# Altium PCB imu-pcb.PcbDoc
Units mil, origin at the board's own origin, x right, y up, seen from the top; angles counter-clockwise.
Board outline 905.51 x 1181.1 mil, 2 copper layers (Top Layer, Bottom Layer); 7 components, 11 nets, 28 pads, 1 vias.
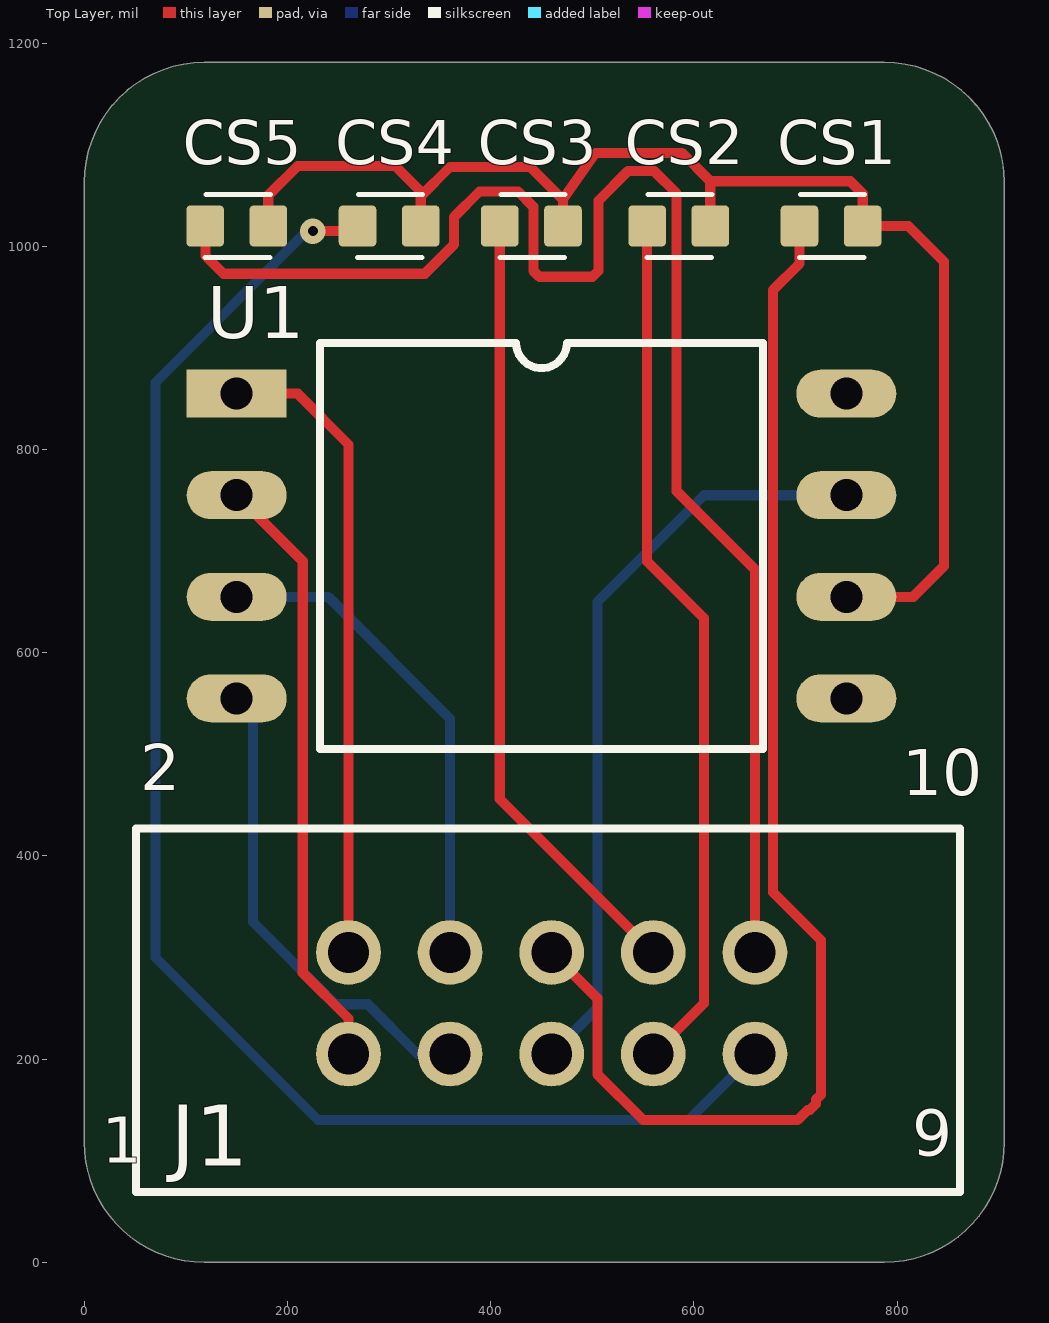
[diagram p0: Top Layer view]
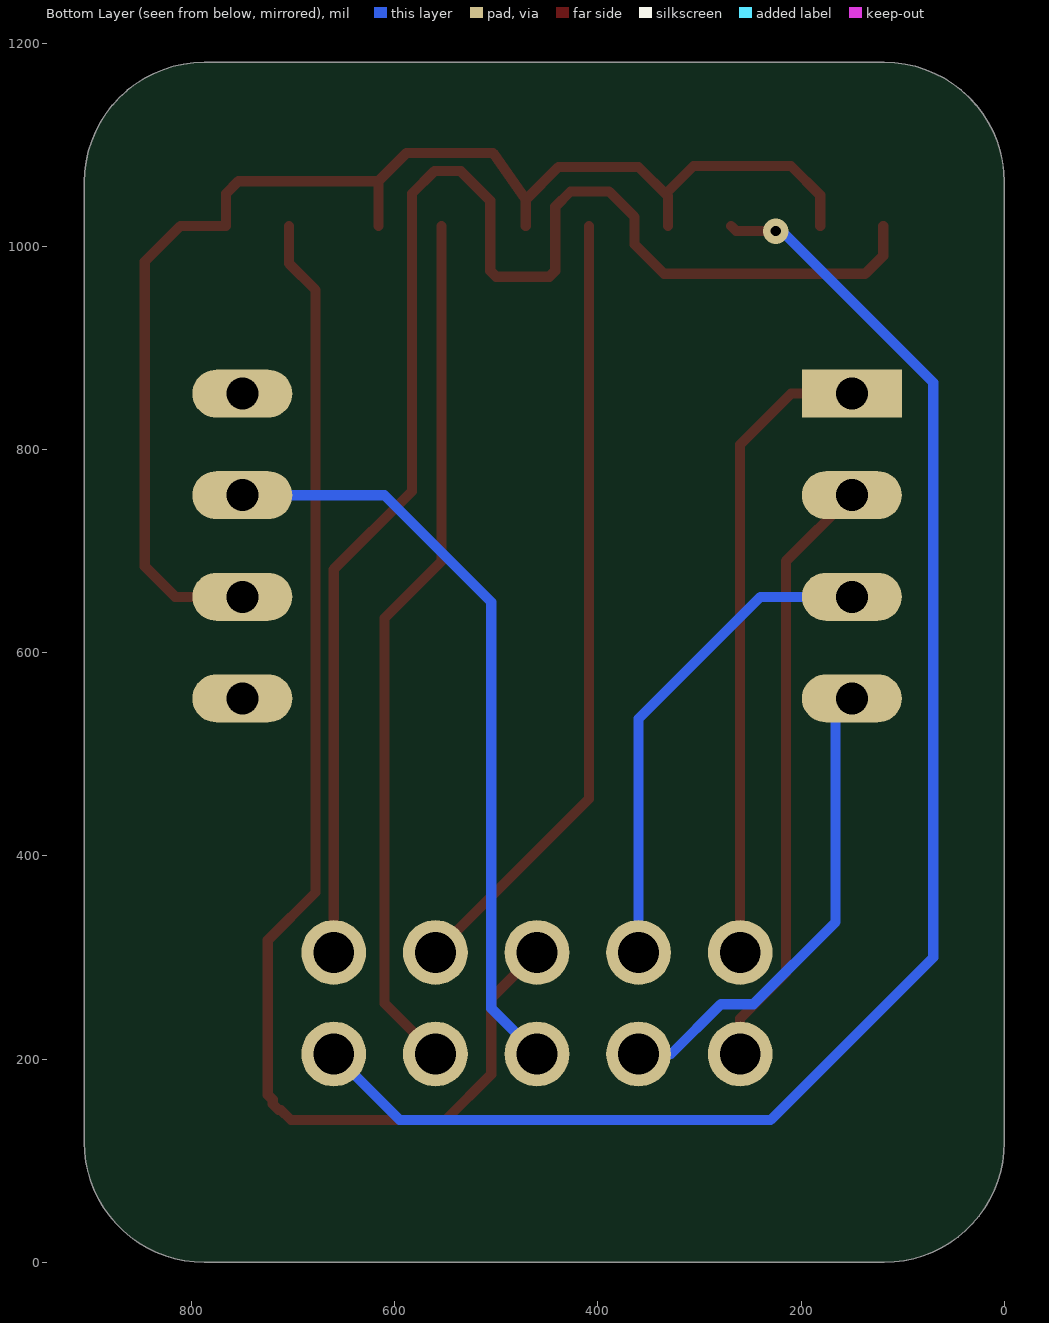
[diagram p1: Bottom Layer view, seen from below]
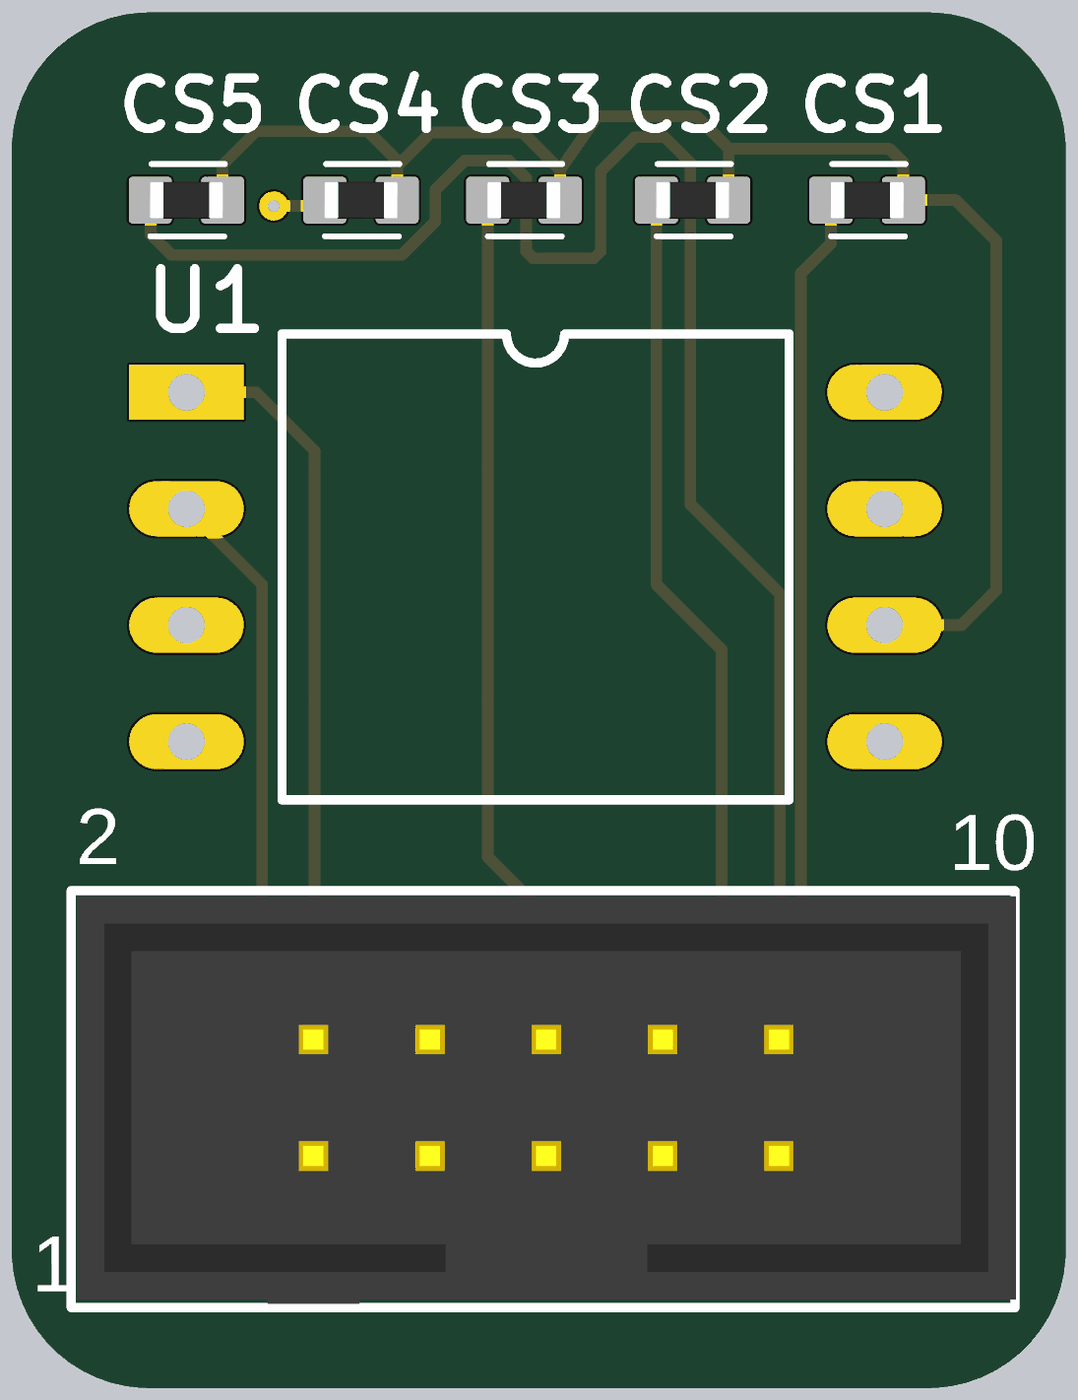
[diagram p2: 3D render of the assembled board from above, using the file's embedded part models]

## Layer stack, top to bottom
Top Solder: solder mask 0.4, Solder Resist, Dk 3.5
Top Layer: signal copper 1.4
Dielectric 1: dielectric 12.6, FR-4, Dk 4.8
Bottom Layer: signal copper 1.4
Bottom Solder: solder mask 0.4, Solder Resist, Dk 3.5

## Board outline
118.11,0 cw(c118.11,118.11) 0,118.11 0,1062.99 cw(c118.11,1062.99) 118.11,1181.1 787.4,1181.1 cw(c787.4,1062.99) 905.51,1062.99 905.51,118.11 cw(c787.4,118.11) 787.4,0

## Design rules (kind name [scope] priority, off if disabled: settings)
Clearance [All] p1: gap=10 ignorepadtopadclearanceinfootprint=FALSE except(0: Arc-Hole Track-Hole SMDPad-Hole THPad-Hole Via-Hole Fill-Hole Poly-Hole Region-Hole Text-Hole; 5: Arc-SMDPad Track-SMDPad SMDPad-SMDPad; 6: Arc-Arc Arc-Track Track-Track; 7.87: Arc-THPad Track-THPad; 21.26: SMDPad-THPad)
HoleSize [All] p1: absolutevalues=TRUE maxlimit=248.03 minlimit=7.87 maxpercent=80.000 minpercent=20.000
HoleToHoleClearance [All] p1: gap=21.26 allowstackedmicrovias=TRUE
MinimumAnnularRing [All] p1: minimumring=5.91
MinimumSolderMaskSliver [All] p1: minsoldermaskwidth=3.94
PolygonConnect [All] p1: connectstyle=Relief reliefconductorwidth=10 reliefentries=4 polygonreliefangle="90 Angle" airgapwidth=10
RoutingVias [All] p1: holewidth=10 width=25 viastyle="Through Hole" minholewidth=7.87 minwidth=17.72 maxholewidth=28 maxwidth=50
SilkToSilkClearance [All] p1: silktosilkclearance=5.91
SilkToSolderMaskClearance [IsPad] p1: minsilkscreentomaskgap=5 clearancetoexposedcopper=TRUE
SolderMaskExpansion [All] p1: expansion=1.97 istentingtop=FALSE
UnRoutedNet [All] p1: checkbadconnections=TRUE
Width [All] p1: maxlimit=10 minlimit=10 preferedwidth=10
24 further rules are at their usual default settings.

## Components (designator, comment, footprint, x,y, rotation, side; value= is the part's Value field where it differs from the comment)
CS1 "0_Ohm" RESC1608X50N 735,1020 r180 top
CS2 "0_Ohm" RESC1608X50N 585,1020 r180 top
CS3 "0_Ohm" RESC1608X50N 440,1020 r180 top
CS4 "0_Ohm" RESC1608X50N 300,1020 r180 top
CS5 "0_Ohm" RESC1608X50N 150,1020 r180 top
J1 "SAMTEC-MTSW-105-07-X-D-240J" IDC_2.54_10 460,255 r0 top
U1 "Sparkfun_MPU9250" SPARKFUN_MPU9250 150,855 r0 top locked

## Footprints (in the part's own frame and the unit in brackets; to place one, negate y for a bottom-side part, rotate by r counter-clockwise, add the part's x,y. Pads: shape width x height; smd on the part's side, far side on the other; paste and mask are expansions set on the pad)
IDC_2.54_10 [mm]
  round 1.62 hole 1.02 mask+0.11: 1(-5.08,-1.27) 2(-5.08,1.27) 3(-2.54,-1.27) 4(-2.54,1.27) 5(0,-1.27) 6(0,1.27) 7(2.54,-1.27) 8(2.54,1.27) 9(5.08,-1.27) 10(5.08,1.27)
  silkscreen extent -10.39,-4.72 10.21,4.37, body extent -10.27,-4.65 10.23,4.25, height 9
RESC1608X50N [mm]
  rrect20% 0.94x1.02 smd: 1(-0.79,0) 2(0.79,0)
  silkscreen extent -0.84,-0.79 0.79,0.79, body extent -0.8,-0.4 0.8,0.4, height 0.45
SPARKFUN_MPU9250 [mm]
  rect 2.5x1.2 hole 0.8: 1(0,0)
  oval 2.5x1.2 hole 0.8: 2(0,-2.54) 3(0,-5.08) 4(0,-7.62) 5(15.24,-7.62) 6(15.24,-5.08) 7(15.24,-2.54) 8(15.24,0)
  silkscreen extent 2.08,-8.89 13.16,1.27, body extent -1.53,-10.19 16.97,7.51, height 4.64

## Part data
CS1 CS2 CS3 CS4 CS5: library part RES-0603_0, "RES SMD 10 OHM 0.1% 1/16W 0603", Package=0603, Power_Rating=".063 W", Resistance=10, Tolerance=.1%, Voltage_Rating="50 V", Availability=Warning, EU_RoHS_Compliance=Compliant, MF="TE Connectivity", MP=8-1614350-7, Price=None, SnapEDA_Link=https://www.snapeda.com/parts/8-1614350-7/TE%20Connectivity/view-part/2208042/?ref=snap
J1: library part IDC_2.54mm_10pos, "5x2 male connector (2.54mm)"
U1: "https://learn.sparkfun.com/tutorials/mpu-9250-hookup-guide/all#resources-and-going-further"

## Via types
v1: diameter 25, hole 10, Top Layer to Bottom Layer, 1 vias

## Nets (pads, with @x,y where several pads share a name; then routed paths per layer and width w, separated by ;. In a path a pad name is that pad's centre, name@x,y a point inside that pad or via, vN(x,y) a via of type N, cw(c..) or ccw(c..) an arc to the next point about the centre after c; other vN are vias at no path point)
3V3: J1.1 U1.2 | length 595.6
  Top Layer w10: U1.2 215,690 215,285 260,240 J1.1
CS_1: CS1.2 J1.6 | length 1275.3
  Top Layer w10: J1.6 505,260 505,185 550,140 702.07,140 712.07,150 714.14,150 720,155.86 720,160 725,165 725,317 678,364 678,957.1 703.9,983 CS1.2
CS_2: CS2.2 J1.7 | length 858.9
  Top Layer w10: CS2.2 553.9,690.1 610,634 610,255 J1.7
CS_3: CS3.2 J1.8 | length 777.6
  Top Layer w10: CS3.2 408.9,456.1 J1.8
CS_4: CS4.2 J1.9 | length 1511.9
  Top Layer w10: v1(225,1015) 263.9,1015 CS4.2
  Bottom Layer w10: v1(225,1015) 218.96,1015 70,866.04 70,300 230,140 595,140 J1.9
CS_5: CS5.2 J1.10 | length 1493.2
  Top Layer w10: CS5.2 119.22,1019.68 119.22,990.78 137,973 335,973 364,1002 364,1029 389,1054 427,1054 442,1039 442,975.86 447.86,970 500.14,970 506,975.86 506,1045 535,1074 561,1074 583,1052 583,759 660,682 J1.10
GND: J1.2 U1.1 | length 630.7
  Top Layer w10: U1.1 210,855 260,805 J1.2
MISO: J1.5 U1.7 | length 752.1
  Bottom Layer w10: J1.5 505,250 505,650 610,755 U1.7
MOSI: J1.4 U1.3 | length 489.7
  Bottom Layer w10: U1.3 240,655 360,535 J1.4
NetCS1_1: CS1.1 CS2.1 CS3.1 CS4.1 CS5.1 U1.6 | length 1340.9
  Top Layer w10: CS5.1 181.1,1050.2 210,1079.1 305.9,1079.1 333.45,1051.55 ; CS4.1 331.1,1025.95 331.1,1049.2 360,1078.1 438.9,1078.1 471.1,1045.9 ; CS3.1 471.1,1045.9 ; CS2.1 616.1,1064.1 ; U1.6 816,655 846,685 846,985 811,1020 CS1.1 766.1,1051.9 753.9,1064.1 616.1,1064.1 ; 471.1,1045.9 503.1,1092 588.2,1092 616.1,1064.1
SCK: J1.3 U1.4 | length 483.8
  Bottom Layer w10: U1.4 166,555 166,335 247,254 279,254 328,205 J1.3
pads on no net: U1.5 U1.8

## Silkscreen, mask and mechanical layers (free items; w line width, h text height)
Mechanical 10:
  the board outline again, w0.5

## Text inside footprints (layer, text, board x,y; h text height)
J1: Top Overlay "10" at 805,445 h77.5; Top Overlay "9" at 815,90 h77.5; Top Overlay "2" at 55,450 h77.5; Top Overlay "1" at 17,83 h77.5